# Altium PCB Mirror_PCB1.PcbDoc (part 1 of 2)
Units mm, origin at the board's own origin, x right, y up, seen from the top; angles counter-clockwise.
Board outline 98.5 x 98 mm, 2 copper layers (Top Layer, Bottom Layer), stack 0.187 mm thick; 46 components, 20 nets, 175 pads, 239 vias.
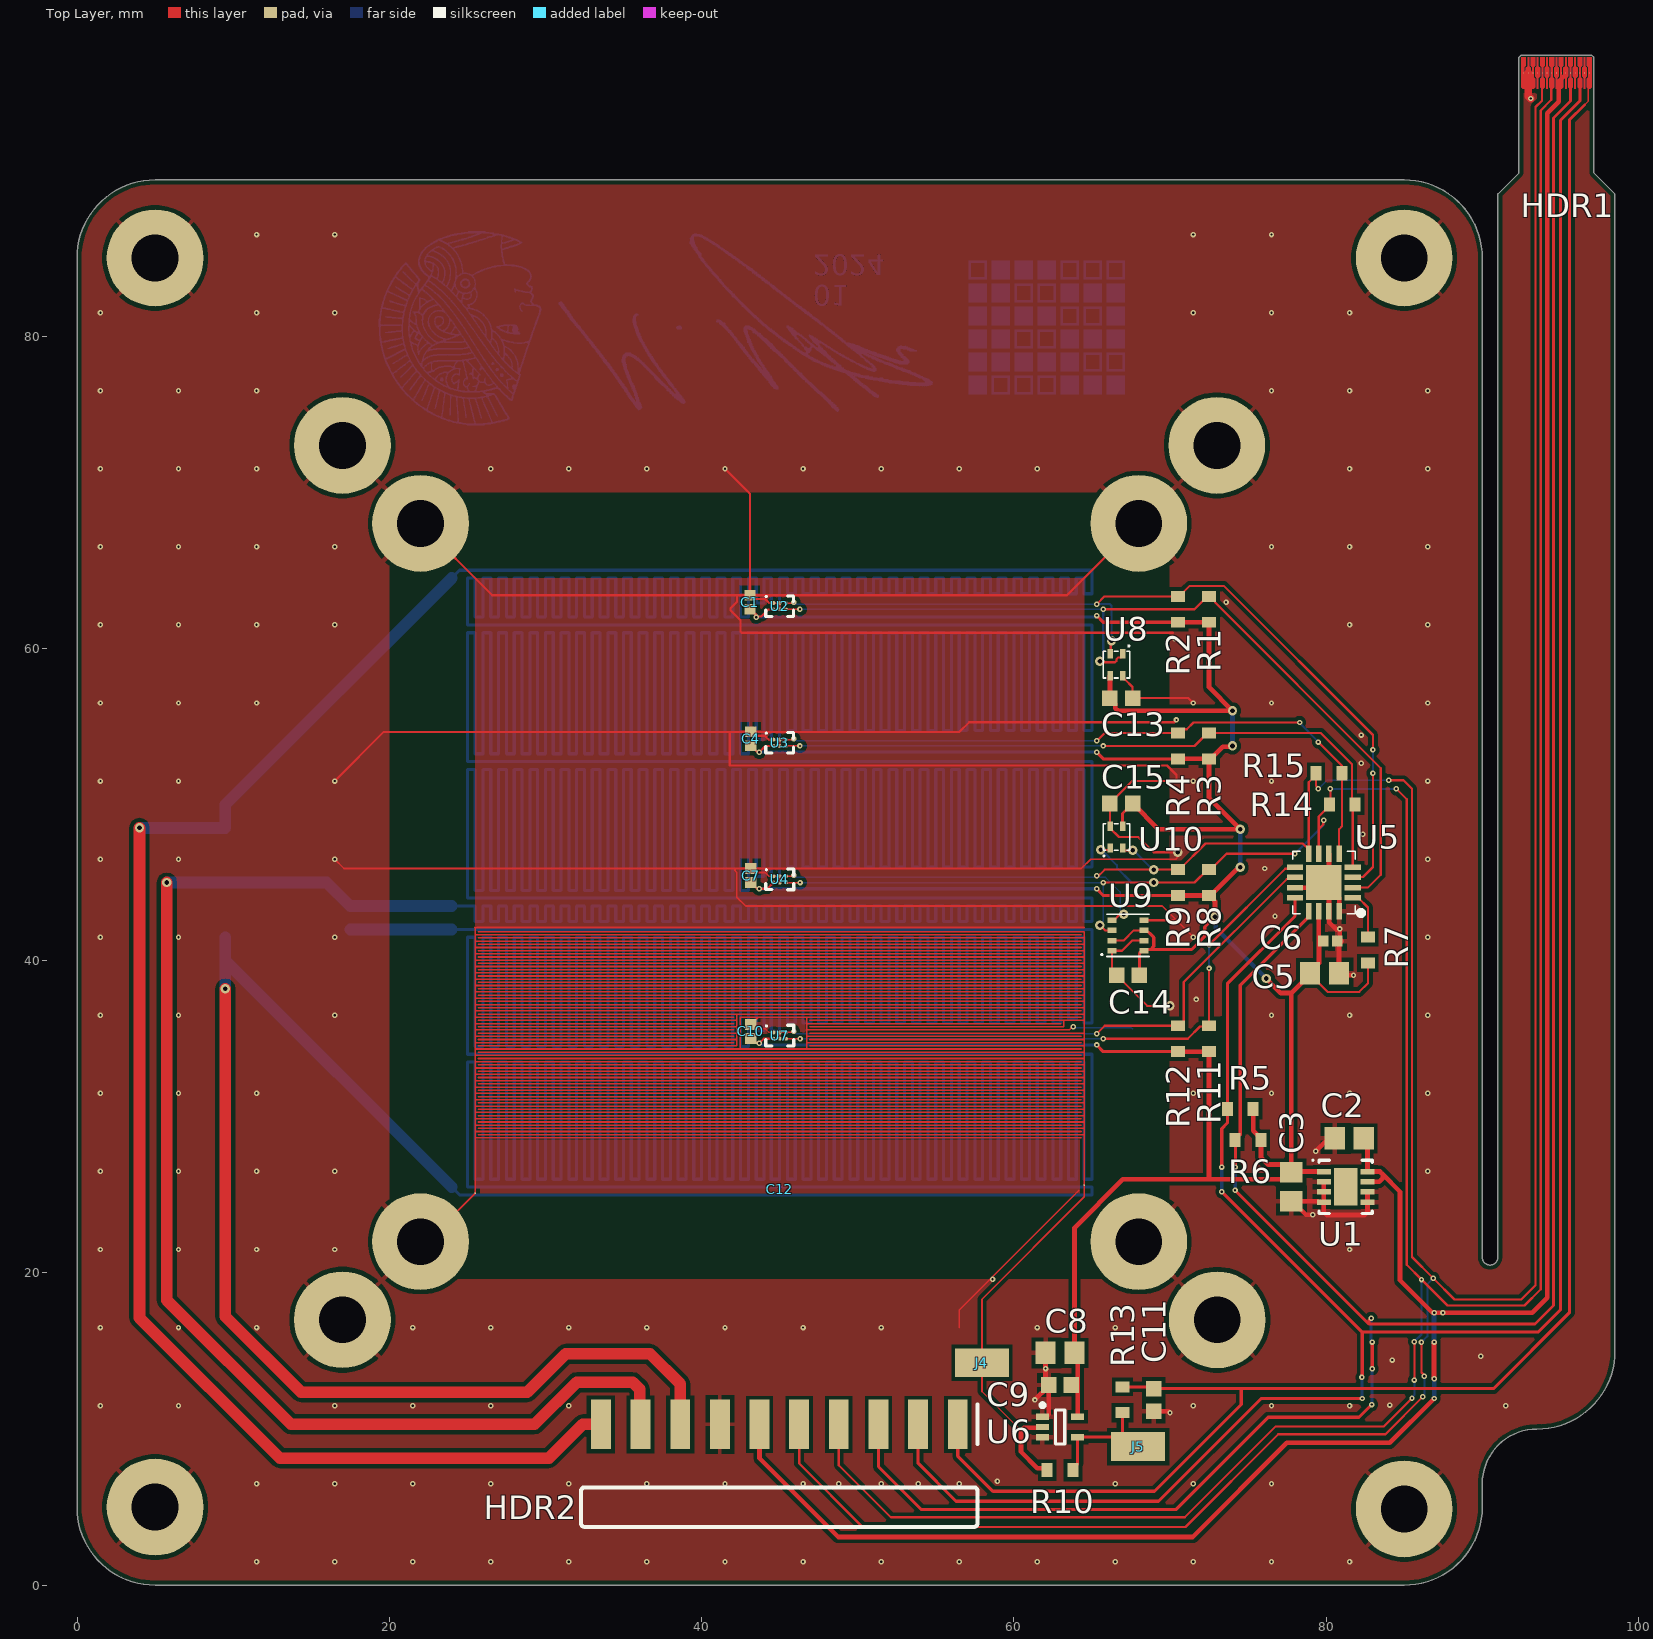
[diagram p0: Top Layer view]
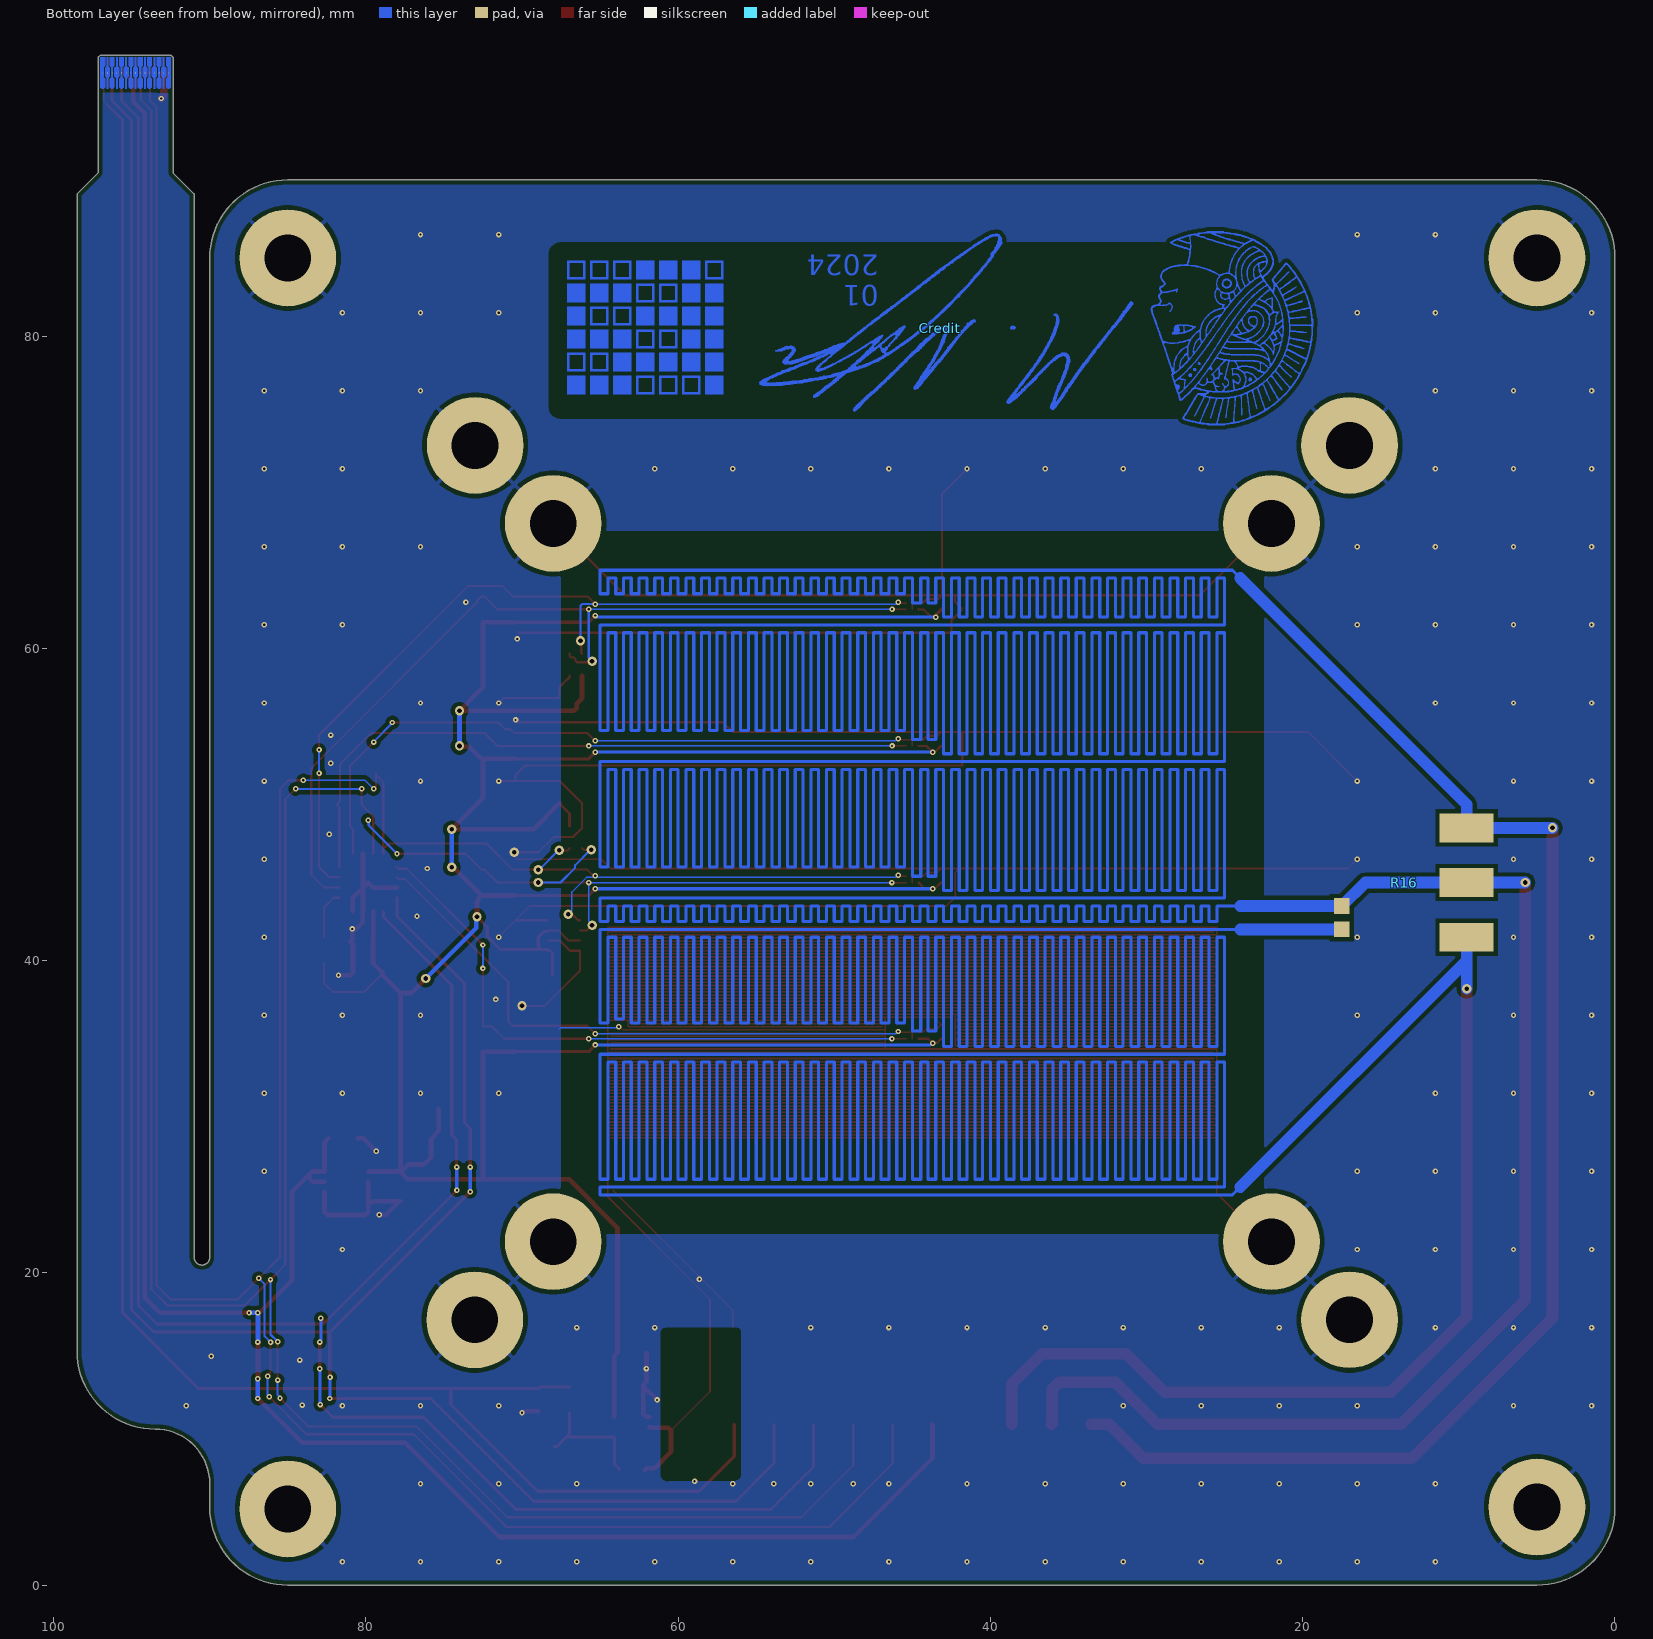
[diagram p1: Bottom Layer view, seen from below]

## Layer stack, top to bottom
Stiffener 1: core 0.1016, Core-009, Dk 4.5
Board Layer Stack Top Coverlay: solder mask 0.012, FC-001, Dk 4
Top Layer: signal copper 0.0175
Dielectric 1: core 0.0508, Core-001, Dk 4.1
Bottom Layer: signal copper 0.0175
Board Layer Stack Bottom Coverlay: solder mask 0.012, FC-001, Dk 4

## Board outline
0,5 ccw(c5,5) 5,0 85,0 ccw(c85,5) 90,5 90,6.5 cw(c93.5,6.5) 93.5,10 ccw(c93.5,15) 98.5,15 98.5,89.1 97.15,90.45 97.15,97.85 97,98 92.5,98 92.35,97.85 92.35,90.45 91,89.1 91,21 cw(c90.5,21) 90.5,20.5 cw(c90.5,21) 90,21 90,85 ccw(c85,85) 85,90 5,90 ccw(c5,85) 0,85

## Design rules (kind name [scope] priority, off if disabled: settings)
BoardOutlineClearance [All] p1: gap=0.3 ignorepadtopadclearanceinfootprint=FALSE
Clearance [All] p1: gap=0.15 ignorepadtopadclearanceinfootprint=TRUE except(0.102: Arc-Arc Arc-Track Arc-Via Arc-Text Track-Track Track-Via Track-Text SMDPad-Via SMDPad-Text THPad-Via THPad-Text Via-Via Via-Text Fill-Text Poly-Text Region-Text Text-Text; 0.2: Arc-Hole Track-Hole SMDPad-Hole THPad-Hole Via-Hole Fill-Hole Poly-Hole Region-Hole Text-Hole)
Creepage [All] p1: checkdistance=0.254 applytopolygonpour=TRUE
DiffPairsRouting DifferentialPairsRouting_1 [InDifferentialPairClass('All Differential Pairs')] p1: maxlimit=0.3 minlimit=0.15 mostfreqgap=0.15 toplayer_minwidth=0.102 toplayer_maxwidth=0.3 toplayer_prefwidth=0.15 bottomlayer_minwidth=0.102 bottomlayer_maxwidth=0.3 bottomlayer_prefwidth=0.15 maxuncoupledlength=12.7
DiffPairsRouting [All] p2: maxlimit=0.3 minlimit=0.102 mostfreqgap=0.15 toplayer_minwidth=0.102 toplayer_maxwidth=0.3 toplayer_prefwidth=0.15 bottomlayer_minwidth=0.102 bottomlayer_maxwidth=0.3 bottomlayer_prefwidth=0.15 maxuncoupledlength=12.7
HoleSize [All] p1: absolutevalues=TRUE maxlimit=5 minlimit=0.15 maxpercent=80.000 minpercent=20.000
HoleToHoleClearance [All] p1: gap=0.3 allowstackedmicrovias=TRUE
MinimumAnnularRing [All] p1: minimumring=0.1
MinimumSolderMaskSliver [All] p1: minsoldermaskwidth=0.5
NetAntennae NetAntennae_GND [InNet('GND')] p1: netantennaetolerance=500
NetAntennae NetAntennae_GND_1 [InNet('NetC12_2')] p2: netantennaetolerance=500
NetAntennae [All] p3: netantennaetolerance=0
PasteMaskExpansion [All] p1: expansion=0.2 percent=-10.000000
PlaneClearance [All] p1: clearance=0.381
PlaneConnect [All] p1: pad.planeconnectstyle=Relief pad.reliefexpansion=0.508 pad.reliefentries=4 pad.reliefconductorwidth=0.254 pad.reliefairgap=0.254 via.planeconnectstyle=Direct via.reliefexpansion=0.508 via.reliefentries=4 via.reliefconductorwidth=0.254 via.reliefairgap=0.254
PolygonConnect [All] p1: thpad.connectstyle=Relief thpad.reliefconductorwidth=0.254 thpad.reliefentries=4 thpad.polygonreliefangle="90 Angle" thpad.airgapwidth=0.28 thpad.conductorbypadedge=TRUE thpad.mindistance=0.381 thpad.enablemindistance=FALSE smdpad.connectstyle=Relief smdpad.reliefconductorwidth=0.254 smdpad.reliefentries=4 smdpad.polygonreliefangle="90 Angle" smdpad.airgapwidth=0.28 smdpad.conductorbypadedge=TRUE smdpad.mindistance=0.381 smdpad.enablemindistance=FALSE via.connectstyle=Direct via.reliefconductorwidth=0.254 via.reliefentries=4 via.polygonreliefangle="90 Angle" via.airgapwidth=0.254
RoutingVias RoutingViaStyle_1 [All] p1: holewidth=0.254 width=0.254 viastyle="Through Hole" minholewidth=0.15 minwidth=0.35 maxholewidth=5 maxwidth=8
RoutingVias [All] p2: holewidth=0.2 width=0.4 viastyle="Through Hole" minholewidth=0.2 minwidth=0.4 maxholewidth=0.2 maxwidth=0.4
SMDNeckDown [All] p1: percent=100.000
SilkToSilkClearance [All] p1: silktosilkclearance=0
SilkToSolderMaskClearance SilkscreenOverComponentPads [IsPad] p1: minsilkscreentomaskgap=0 clearancetoexposedcopper=TRUE
SolderMaskExpansion [All] p1: expansion=0.1 istentingtop=FALSE
Width [All] p1: maxlimit=0.8 minlimit=0.102 preferedwidth=0.15 minimp=50.000000 maximp=50.000000 favimp=50.000000
20 further rules are at their usual default settings.

## Components (designator, comment, footprint, x,y, rotation, side; value= is the part's Value field where it differs from the comment)
C1 "10nF" CAP_SM0402_YAGEOCC2_N 43.1,62.95 r90 top
C2 "1uF" CAP_SM0805_YAGEOCC2_N 81.474,28.619 r180 top
C3 "1uF" CAP_SM0805_YAGEOCC2_N 77.771,25.514 r270 top
C4 "10nF" CAP_SM0402_YAGEOCC2_N 43.146,54.2 r90 top
C5 "1uF" CAP_SM0805_YAGEOCC2_N 79.896,39.196 r0 top
C6 "10nF" CAP_SM0402_YAGEOCC2_N 80.272,41.25 r0 top
C7 "10nF" CAP_SM0402_YAGEOCC2_N 43.146,45.45 r90 top
C8 "1uF" CAP_SM0805_YAGEOCC2_N 62.959,14.876 r180 top
C9 "10nF" CAP_SM0603_YAGEOCC2_N 62.959,12.822 r180 top
C10 "10nF" CAP_SM0402_YAGEOCC2_N 43.146,35.461 r90 top
C11 "10nF" CAP_SM0603_YAGEOCC2_N 68.959,11.862 r270 top
C12 "Capacitor_InterdigitatedFingers" CapacitorWire 25.5,25 r0 top
C13 "100nF" CAP_SM0603_YAGEOCC2_N 66.876,56.81 r0 top
C14 "100nF" CAP_SM0603_YAGEOCC2_N 67.308,39.058 r180 top
C15 "100nF" CAP_SM0603_YAGEOCC2_N 66.876,50.066 r180 top
Credit "Credits" CREDITS_CU_SIGNED 43.2,80.5 r0 bottom
HDR1 "Dual Row 15Pos FPC Contacts" AYF331535_FPC 96.85,95.85 r180 top
HDR2 "TSM-120-01-T-SH" TSM-120-01-T-SH 56.41,10.3 r180 top
J4 "S1751-46 TestPoint" "S1751-46 TestPoint" 57.959,14.246 r0 top
J5 "S1751-46 TestPoint" "S1751-46 TestPoint" 67.959,8.876 r0 top
R1 "3K3" RES_SM0603_YAGEORC_N 72.5,62.5 r270 top
R2 "3K3" RES_SM0603_YAGEORC_N 70.5,62.5 r270 top
R3 "3K3" RES_SM0603_YAGEORC_N 72.5,53.75 r270 top
R4 "3K3" RES_SM0603_YAGEORC_N 70.5,53.75 r270 top
R5 "3K3" RES_SM0603_YAGEORC_N 74.5,30.5 r180 top
R6 "3K3" RES_SM0603_YAGEORC_N 75,28.5 r180 top
R7 "10K" RES_SM0603_YAGEORC_N 82.678,40.674 r90 top
R8 "3K3" RES_SM0603_YAGEORC_N 72.5,45 r270 top
R9 "3K3" RES_SM0603_YAGEORC_N 70.5,45 r270 top
R10 "10K" RES_SM0603_YAGEORC_N 62.959,7.376 r180 top
R11 "3K3" RES_SM0603_YAGEORC_N 72.5,35 r270 top
R12 "3K3" RES_SM0603_YAGEORC_N 70.5,35 r270 top
R13 "10K" RES_SM0603_YAGEORC_N 66.959,11.876 r270 top
R14 "0" RES_SM0603_YAGEORC_N 81.033,50 r0 top
R15 "0" RES_SM0603_YAGEORC_N 80.181,52 r0 top
R16 "HeaterWire_1" HeaterWire_1 9.5,48.5 r0 top
U1 "TPS78433" TPS784xxxQDRBRQ1_SON 81.251,25.514 r0 top
U2 "AS6221" AS6221_BGA_LargePads 45,62.7 r0 top
U3 "AS6221" AS6221_BGA_LargePads 45,53.95 r0 top
U4 "AS6221" AS6221_BGA_LargePads 45.007,45.2 r0 top
U5 "PCA9546ARGVR" QFN65P400X400X100-17N-D 79.856,45 r180 top
U6 "SN74LVC1G14" SOT65P210X110-5N_SC70 62.959,10.131 r0 top
U7 "AS6221" AS6221_BGA_LargePads 45.007,35.2 r0 top
U8 "SHT45-AD1F" "SHT45 DFN" 66.563,58.951 r270 top
U9 "BME280_I2C" BME280 67.308,41.612 r180 top
U10 "SHT45-AD1F" "SHT45 DFN" 66.563,47.912 r90 top

## Footprints (in the part's own frame and the unit in brackets; to place one, negate y for a bottom-side part, rotate by r counter-clockwise, add the part's x,y. Pads: shape width x height; smd on the part's side, far side on the other; paste and mask are expansions set on the pad)
AS6221_BGA_LargePads [mm] "BGA, 6-Leads, Body 1.50x1.02mmx0.55mm, Pitch 0.40mm"
  round 0.25 smd paste-0.013: A1(-0.4,0.2) A2(0,0.2) A3(0.4,0.2) B1(-0.4,-0.2) B2(0,-0.2) B3(0.4,-0.2)
  silkscreen extent -0.9,-0.66 0.89,0.67, body extent -0.75,-0.52 0.75,0.52, height 0.55
AYF331535_FPC [mil]
  round 1 all layers, no hole paste-99999 mask+3.94: 1(0,-39.37) 2(11.81,-39.37)
  round 1 all layers, no hole paste-99999: 3(23.62,-39.37) 4(35.43,-39.37) 5(47.24,-39.37) 6(59.06,-39.37) 7(70.87,-39.37) 8(82.68,-39.37) 9(94.49,-39.37) 10(106.3,-39.37) 11(118.11,-39.37) 12(129.92,-39.37) 13(141.73,-39.37) 14(153.54,-39.37) 15(165.35,-39.37)
  Top Layer region: -5.91,-78.74 -5.91,-3.94 -1.97,0 -1.97,0 1.97,0 5.91,-3.94 5.91,-24.61 1.97,-28.54 1.97,-54.13 5.91,-58.07 5.91,-78.74
  Top Layer region: 5.91,-52.17 5.91,-30.51 9.84,-26.57 9.84,0 13.78,0 13.78,-26.57 17.72,-30.51 17.72,-52.17 13.78,-56.1 13.78,-78.74 9.84,-78.74 9.84,-56.1
  Top Layer region: 17.72,-78.74 17.72,-58.07 21.65,-54.13 21.65,-28.54 17.72,-24.61 17.72,-3.94 21.65,0 25.59,0 29.53,-3.94 29.53,-24.61 25.59,-28.54 25.59,-54.13 29.53,-58.07 29.53,-78.74
  Top Layer region: 29.53,-52.17 29.53,-30.51 33.46,-26.57 33.46,0 37.4,0 37.4,-26.57 41.34,-30.51 41.34,-52.17 37.4,-56.1 37.4,-78.74 33.46,-78.74 33.46,-56.1
  Top Layer region: 41.34,-78.74 41.34,-58.07 45.28,-54.13 45.28,-28.54 41.34,-24.61 41.34,-3.94 45.28,0 49.21,0 53.15,-3.94 53.15,-24.61 49.21,-28.54 49.21,-54.13 53.15,-58.07 53.15,-78.74
  Top Layer region: 64.96,-78.74 64.96,-58.07 68.9,-54.13 68.9,-28.54 64.96,-24.61 64.96,-3.94 68.9,0 72.83,0 76.77,-3.94 76.77,-24.61 72.83,-28.54 72.83,-54.13 76.77,-58.07 76.77,-78.74
  Top Layer region: 53.15,-52.17 53.15,-30.51 57.09,-26.57 57.09,0 61.02,0 61.02,-26.57 64.96,-30.51 64.96,-52.17 61.02,-56.1 61.02,-78.74 57.09,-78.74 57.09,-56.1
  Top Layer region: 76.77,-52.17 76.77,-30.51 80.71,-26.57 80.71,0 84.65,0 84.65,-26.57 88.58,-30.51 88.58,-52.17 84.65,-56.1 84.65,-78.74 80.71,-78.74 80.71,-56.1
  Top Layer region: 88.58,-78.74 88.58,-58.07 92.52,-54.13 92.52,-28.54 88.58,-24.61 88.58,-3.94 92.52,0 96.46,0 100.39,-3.94 100.39,-24.61 96.46,-28.54 96.46,-54.13 100.39,-58.07 100.39,-78.74
  Top Layer region: 100.39,-52.17 100.39,-30.51 104.33,-26.57 104.33,0 108.27,0 108.27,-26.57 112.2,-30.51 112.2,-52.17 108.27,-56.1 108.27,-78.74 104.33,-78.74 104.33,-56.1
  Top Layer region: 112.2,-78.74 112.2,-58.07 116.14,-54.13 116.14,-28.54 112.2,-24.61 112.2,-3.94 116.14,0 120.08,0 124.02,-3.94 124.02,-24.61 120.08,-28.54 120.08,-54.13 124.02,-58.07 124.02,-78.74
  Top Layer region: 124.02,-52.17 124.02,-30.51 127.95,-26.57 127.95,0 131.89,0 131.89,-26.57 135.83,-30.51 135.83,-52.17 131.89,-56.1 131.89,-78.74 127.95,-78.74 127.95,-56.1
  Top Layer region: 135.83,-78.74 135.83,-58.07 139.76,-54.13 139.76,-28.54 135.83,-24.61 135.83,-3.94 139.76,0 143.7,0 147.64,-3.94 147.64,-24.61 143.7,-28.54 143.7,-54.13 147.64,-58.07 147.64,-78.74
  Top Layer region: 147.64,-52.17 147.64,-30.51 151.57,-26.57 151.57,0 155.51,0 155.51,-26.57 159.45,-30.51 159.45,-52.17 155.51,-56.1 155.51,-78.74 151.57,-78.74 151.57,-56.1
  Top Layer region: 159.45,-78.74 159.45,-58.07 163.39,-54.13 163.39,-54.13 163.39,-28.54 159.45,-24.61 159.45,-24.61 159.45,-3.94 163.39,0 167.32,0 171.26,-3.94 171.26,-78.74
  Bottom Layer region: -5.91,-78.74 -5.91,-3.94 -1.97,0 -1.97,0 1.97,0 5.91,-3.94 5.91,-24.61 1.97,-28.54 1.97,-54.13 5.91,-58.07 5.91,-78.74
  Bottom Layer region: 5.91,-52.17 5.91,-30.51 9.84,-26.57 9.84,0 13.78,0 13.78,-26.57 17.72,-30.51 17.72,-52.17 13.78,-56.1 13.78,-78.74 9.84,-78.74 9.84,-56.1
  Bottom Layer region: 17.72,-78.74 17.72,-58.07 21.65,-54.13 21.65,-28.54 17.72,-24.61 17.72,-3.94 21.65,0 25.59,0 29.53,-3.94 29.53,-24.61 25.59,-28.54 25.59,-54.13 29.53,-58.07 29.53,-78.74
  Bottom Layer region: 29.53,-52.17 29.53,-30.51 33.46,-26.57 33.46,0 37.4,0 37.4,-26.57 41.34,-30.51 41.34,-52.17 37.4,-56.1 37.4,-78.74 33.46,-78.74 33.46,-56.1
  Bottom Layer region: 41.34,-78.74 41.34,-58.07 45.28,-54.13 45.28,-28.54 41.34,-24.61 41.34,-3.94 45.28,0 49.21,0 53.15,-3.94 53.15,-24.61 49.21,-28.54 49.21,-54.13 53.15,-58.07 53.15,-78.74
  Bottom Layer region: 64.96,-78.74 64.96,-58.07 68.9,-54.13 68.9,-28.54 64.96,-24.61 64.96,-3.94 68.9,0 72.83,0 76.77,-3.94 76.77,-24.61 72.83,-28.54 72.83,-54.13 76.77,-58.07 76.77,-78.74
  Bottom Layer region: 53.15,-52.17 53.15,-30.51 57.09,-26.57 57.09,0 61.02,0 61.02,-26.57 64.96,-30.51 64.96,-52.17 61.02,-56.1 61.02,-78.74 57.09,-78.74 57.09,-56.1
  Bottom Layer region: 76.77,-52.17 76.77,-30.51 80.71,-26.57 80.71,0 84.65,0 84.65,-26.57 88.58,-30.51 88.58,-52.17 84.65,-56.1 84.65,-78.74 80.71,-78.74 80.71,-56.1
  Bottom Layer region: 88.58,-78.74 88.58,-58.07 92.52,-54.13 92.52,-28.54 88.58,-24.61 88.58,-3.94 92.52,0 96.46,0 100.39,-3.94 100.39,-24.61 96.46,-28.54 96.46,-54.13 100.39,-58.07 100.39,-78.74
  Bottom Layer region: 100.39,-52.17 100.39,-30.51 104.33,-26.57 104.33,0 108.27,0 108.27,-26.57 112.2,-30.51 112.2,-52.17 108.27,-56.1 108.27,-78.74 104.33,-78.74 104.33,-56.1
  Bottom Layer region: 112.2,-78.74 112.2,-58.07 116.14,-54.13 116.14,-28.54 112.2,-24.61 112.2,-3.94 116.14,0 120.08,0 124.02,-3.94 124.02,-24.61 120.08,-28.54 120.08,-54.13 124.02,-58.07 124.02,-78.74
  Bottom Layer region: 124.02,-52.17 124.02,-30.51 127.95,-26.57 127.95,0 131.89,0 131.89,-26.57 135.83,-30.51 135.83,-52.17 131.89,-56.1 131.89,-78.74 127.95,-78.74 127.95,-56.1
  Bottom Layer region: 135.83,-78.74 135.83,-58.07 139.76,-54.13 139.76,-28.54 135.83,-24.61 135.83,-3.94 139.76,0 143.7,0 147.64,-3.94 147.64,-24.61 143.7,-28.54 143.7,-54.13 147.64,-58.07 147.64,-78.74
  Bottom Layer region: 147.64,-52.17 147.64,-30.51 151.57,-26.57 151.57,0 155.51,0 155.51,-26.57 159.45,-30.51 159.45,-52.17 155.51,-56.1 155.51,-78.74 151.57,-78.74 151.57,-56.1
  Bottom Layer region: 159.45,-78.74 159.45,-58.07 163.39,-54.13 163.39,-54.13 163.39,-28.54 159.45,-24.61 159.45,-24.61 159.45,-3.94 163.39,0 167.32,0 171.26,-3.94 171.26,-78.74
BME280 [mm]
  rect 0.6x0.35 smd: 1(1.025,0.975) 2(1.025,0.325) 3(1.025,-0.325) 4(1.025,-0.975) 5(-1.025,-0.975) 6(-1.025,-0.325) 7(-1.025,0.325) 8(-1.025,0.975)
  silkscreen extent -1.35,-1.35 1.72,1.35, body extent -1.25,-1.25 1.25,1.25, height 1
CAP_SM0402_YAGEOCC2_N [mm] "Capacitor, Yageo CC Class2, SM0402, IPC Medium Density"
  rect 0.68x0.72 smd: 1(-0.45,0) 2(0.45,0)
  body extent -0.55,-0.35 0.55,0.35, height 0.6
CAP_SM0603_YAGEOCC2_N [mm] "Capacitor, Yageo CC Class2, SM0603, IPC Medium Density"
  rect 1x1 smd: 1(-0.727,0) 2(0.727,0)
  body extent -0.9,-0.5 0.9,0.5, height 0.9
CAP_SM0805_YAGEOCC2_N [mm] "Capacitor, Yageo CC Class2, SM0805, IPC Medium Density"
  rect 1.3x1.45 smd: 1(-0.927,0) 2(0.927,0)
  body extent -1.1,-0.72 1.1,0.72, height 1.45
CapacitorWire [mil]
  rect 4x4 smd paste-99999 mask+0: 1(0.06,3.75) 2(1536.06,24.45)
  Top Layer lines w4: 0.06,3.75 0.06,674.21 ; 0.06,143.75 1528.06,143.75 ; 0.06,159.75 1528.06,159.75 ; 0.06,175.75 1528.06,175.75 ; 0.06,191.75 1528.06,191.75 ; 0.06,207.75 1528.06,207.75 ; 0.06,223.75 1528.06,223.75 ; 0.06,239.75 1528.06,239.75 ; 0.06,255.75 1528.06,255.75 ; 0.06,271.75 1528.06,271.75 ; 0.06,287.75 1528.06,287.75 ; 0.06,303.75 1528.06,303.75 ; 0.06,319.75 1528.06,319.75 ; 0.06,335.75 1528.06,335.75 ; 0.06,351.75 1528.06,351.75 ; 0.06,367.75 668.06,367.75 ; 0.06,383.75 652,383.75 ; 0.06,399.75 652,399.75 ; 0.06,415.75 652,415.75 ; 0.06,431.75 652,431.75 ; 0.06,447.75 652,447.75 ; 0.06,463.75 1528.06,463.75 ; 0.06,479.75 1528.06,479.75 ; 0.06,495.75 1528.06,495.75 ; 0.06,511.75 1528.06,511.75 ; 0.06,527.75 1528.06,527.75 ; 0.06,543.75 1528.06,543.75 ; 0.06,559.75 1528.06,559.75 ; 0.06,575.75 1528.06,575.75 ; 0.06,591.75 1528.06,591.75 ; 0.06,607.75 1528.06,607.75 ; 0.06,623.75 1528.06,623.75 ; 0.06,639.75 1528.06,639.75 ; 0.06,655.75 1528.06,655.75 ; 8.07,151.75 1536.02,151.75 ; 8.07,167.75 1536.02,167.75 ; 8.07,183.75 1536.02,183.75 ; 8.07,199.75 1536.02,199.75 ; 8.07,215.75 1536.02,215.75 ; 8.07,231.75 1536.02,231.75 ; 8.07,247.75 1536.02,247.75 ; 8.07,263.75 1536.02,263.75 ; 8.07,279.75 1536.02,279.75 ; 8.07,295.75 1536.02,295.75 ; 8.07,311.75 1536.02,311.75 ; 8.07,327.75 1536.02,327.75 ; 8.07,343.75 1536.02,343.75 ; 8.06,359.75 668.06,359.75 1536.06,359.75 ; 8.06,375.75 660.01,375.75 660.01,455.75 ; 8.06,407.75 659.98,407.75 ; 8.06,423.75 659.94,423.75 ; 8.06,439.75 659.91,439.75 ; 8.07,455.75 1536.02,455.75 ; 8.07,471.75 1536.02,471.75 ; 8.07,487.75 1536.02,487.75 ; 8.07,503.75 1536.02,503.75 ; 8.07,519.75 1536.02,519.75 ; 8.07,535.75 1536.02,535.75 ; 8.07,551.75 1536.02,551.75 ; 8.07,567.75 1536.02,567.75 ; 8.07,583.75 1536.02,583.75 ; 8.07,599.75 1536.02,599.75 ; 8.07,615.75 1536.02,615.75 ; 8.07,631.75 1536.02,631.75 ; 8.07,647.75 1536.02,647.75 ; 8.06,663.75 1536.02,663.75 ; 8.16,391.75 660.01,391.75 ; 844.06,375.75 1536.06,375.75 ; 844.06,391.75 1536.06,391.75 ; 844.06,407.75 1536.06,407.75 ; 844.06,423.75 1484.06,423.75 1484.06,439.72 ; 844.06,439.75 1536.06,439.75 ; 1476.06,431.75 836.06,431.75 ; 1508.06,423.75 1505.83,423.75 1497.83,415.75 836.06,415.75 ; 1528.06,367.75 836.06,367.75 ; 1528.06,383.75 836.06,383.75 ; 1528.06,399.75 836.06,399.75 ; 1528.06,447.75 836.06,447.75 ; 1536.06,24.45 1536.06,439.75 ; 1536.06,471.75 1536.06,487.75 ; 1536.06,661.4 1536.06,487.75 ; 668.06,367.75 836.06,367.75 ; 668.06,367.75 668.06,447.75 836.06,447.75 ; 836.06,367.75 836.06,383.75 ; 836.06,383.75 836.06,399.75 ; 836.06,399.75 836.06,415.75 ; 836.06,415.75 836.06,431.75 ; 836.06,431.75 836.06,447.75 ; 1536.06,439.75 1536.06,487.75
  Top Layer lines w5.51: 0.06,674.21 1535.43,674.21
CREDITS_CU_SIGNED [mm]
  Top Layer region: -19.892,3.183 -19.927,3.219 -19.942,3.277 -19.927,3.363 -19.848,3.399 -19.776,3.385 -19.741,3.349 -19.755,3.219 -19.791,3.183 -19.877,3.183
  Top Layer region: 407 vertices and 73 holes, not listed, extent -23.868,-6.207 -13.456,6.218
  Top Layer region: -18.223,-2.569 -18.094,-2.67 -18.072,-2.691 -18.029,-2.792 -18.044,-2.979 -18.101,-3.079 -18.123,-3.101 -18.151,-3.115 -18.18,-3.144 -18.252,-3.173 -18.374,-3.18 -18.446,-3.166 -18.525,-3.115 -18.619,-3.022 -18.64,-2.943 -18.648,-2.792 -18.576,-2.662 -18.525,-2.612 -18.504,-2.605 -18.497,-2.598 -18.396,-2.554 hole: -18.295,-2.67 -18.41,-2.684 -18.425,-2.684 -18.504,-2.749 -18.533,-2.821 -18.547,-2.878 -18.511,-2.972 -18.489,-2.993 -18.475,-3.022 -18.396,-3.058 -18.338,-3.072 -18.259,-3.051 -18.209,-3.015 -18.159,-2.964 -18.144,-2.907 -18.13,-2.864 -18.159,-2.777 -18.223,-2.698
  Top Layer region: -16.354,2.709 -16.311,2.752 -16.239,2.738 -16.217,2.716 -16.203,2.687 -16.188,2.644 -16.203,2.601 -16.224,2.565 -16.282,2.551 -16.339,2.565 -16.39,2.615 -16.375,2.687 -16.361,2.702
  Top Layer region: -16.081,2.925 -16.102,2.989 -16.088,3.061 -16.052,3.097 -15.994,3.112 -15.937,3.097 -15.901,3.061 -15.879,2.982 -15.901,2.932 -15.922,2.91 -15.994,2.881 -16.066,2.91 -16.073,2.917
  Top Layer region: -14.858,0.379 -14.822,0.343 -14.837,0.286 -14.887,0.235 -14.959,0.192 -14.966,0.142 -14.952,0.099 -14.966,-0.074 -15.024,-0.174 -15.045,-0.196 -15.117,-0.225 -15.175,-0.239 -15.362,-0.254 -15.836,-0.239 -15.879,-0.225 -16.002,-0.203 -16.073,-0.189 -16.145,-0.16 -16.224,-0.138 -16.332,-0.131 -16.339,-0.095 -16.304,-0.045 -16.253,0.005 -16.224,0.02 -16.167,0.077 -16.138,0.092 -16.109,0.12 -15.807,0.264 -15.75,0.279 -15.642,0.314 -15.635,0.322 -15.462,0.35 -15.405,0.365 -15.218,0.379 -15.16,0.394 hole: -15.448,0.25 -15.491,0.235 -15.52,0.221 -15.541,0.199 -15.556,0.142 -15.541,-0.059 -15.505,-0.138 -15.455,-0.146 -15.326,-0.131 -15.297,-0.103 -15.333,-0.009 -15.34,0.012 -15.34,0.027 -15.347,0.106 -15.34,0.243 hole: -15.735,0.178 -15.743,0.171 -15.75,0.163 -15.843,0.128 -16.095,-0.009 -16.102,-0.045 -16.081,-0.067 -16.023,-0.081 -15.944,-0.103 -15.872,-0.117 -15.757,-0.131 -15.678,-0.138 -15.642,-0.117 -15.656,0.07 -15.671,0.128 -15.685,0.171
  Top Layer region: 16.854,2.126 16.854,2.746 18.017,2.746 18.017,1.583 16.854,1.583 16.854,2.048
  Top Layer region: 20.963,3.366 20.963,3.056 19.8,3.056 19.8,4.219 20.963,4.219 20.963,3.443
  Top Layer region: 20.963,2.436 20.963,1.583 19.8,1.583 19.8,2.746 20.963,2.746 20.963,2.513
  Top Layer region: 22.436,1.893 22.436,1.816 22.436,1.583 21.273,1.583 21.273,2.746 22.436,2.746 hole: 22.281,2.591 21.428,2.591 21.428,1.738 22.281,1.738
  Top Layer region: 22.436,3.211 22.436,3.056 21.273,3.056 21.273,4.219 22.436,4.219 22.436,3.288
  Top Layer region: 23.909,1.583 22.746,1.583 22.746,2.746 23.909,2.746 hole: 23.753,2.591 22.901,2.591 22.901,1.738 23.753,1.738 23.753,2.513
  Top Layer region: -16.656,2.292 -16.62,2.342 -16.526,2.349 -16.49,2.313 -16.505,2.213 -16.541,2.177 -16.613,2.191 -16.649,2.227 -16.663,2.285
  Top Layer region: 15.381,0.808 15.381,1.273 16.544,1.273 16.544,0.11 15.381,0.11 15.381,0.73
  Top Layer region: 19.955,0.11 19.8,0.11 19.8,1.273 20.963,1.273 20.963,0.11 20.033,0.11
  Top Layer region: 21.816,1.273 22.436,1.273 22.436,0.11 21.273,0.11 21.273,1.273 21.738,1.273
  Top Layer region: 15.071,-1.208 15.071,-1.363 13.909,-1.363 13.909,-0.2 15.071,-0.2 15.071,-1.13
  Top Layer region: 22.746,1.118 22.746,1.273 23.909,1.273 23.909,0.11 22.746,0.11 22.746,1.04
  Top Layer region: 16.544,3.056 15.381,3.056 15.381,4.219 16.544,4.219 hole: 16.389,4.064 15.536,4.064 15.536,3.676 15.536,3.598 15.536,3.211 16.389,3.211
  Top Layer region: 16.002,-0.2 16.544,-0.2 16.544,-1.363 15.381,-1.363 15.381,-0.2 15.924,-0.2
  Top Layer region: 16.544,2.513 16.544,1.583 15.381,1.583 15.381,2.746 16.544,2.746 16.544,2.591
  Top Layer region: 20.963,-1.363 19.8,-1.363 19.8,-0.51 19.8,-0.433 19.8,-0.2 20.963,-0.2 hole: 20.808,-0.355 19.955,-0.355 19.955,-0.665 19.955,-0.743 19.955,-1.208 20.808,-1.208
  Top Layer region: 18.017,0.11 16.854,0.11 16.854,1.273 18.017,1.273 hole: 17.862,1.118 17.009,1.118 17.009,0.265 17.862,0.265
  Top Layer region: 18.017,3.056 16.854,3.056 16.854,4.219 18.017,4.219 hole: 17.862,4.064 17.009,4.064 17.009,3.211 17.862,3.211
  Top Layer region: 16.854,-0.433 16.854,-0.2 18.017,-0.2 18.017,-1.363 16.854,-1.363 16.854,-0.51
  Top Layer region: 22.436,-1.363 21.273,-1.363 21.273,-0.2 22.436,-0.2 hole: 22.281,-0.355 21.428,-0.355 21.428,-0.665 21.428,-0.743 21.428,-1.208 22.281,-1.208
  Top Layer region: 19.335,-1.363 18.327,-1.363 18.327,-0.2 19.49,-0.2 19.49,-1.363 19.412,-1.363
  Top Layer region: 19.49,3.056 18.327,3.056 18.327,4.219 19.49,4.219 hole: 19.335,4.064 18.482,4.064 18.482,3.211 19.335,3.211
  Top Layer region: 18.327,2.513 18.327,2.746 19.49,2.746 19.49,1.583 18.327,1.583 18.327,2.436
  Top Layer region: 19.49,0.11 18.327,0.11 18.327,1.273 19.49,1.273 hole: 19.335,1.118 18.482,1.118 18.482,0.73 18.482,0.653 18.482,0.265 19.335,0.265
  Top Layer region: 23.753,-0.2 23.909,-0.2 23.909,-1.363 22.746,-1.363 22.746,-0.2 23.676,-0.2
  Top Layer region: 15.071,-4.309 13.909,-4.309 13.909,-3.146 15.071,-3.146 hole: 14.916,-3.301 14.064,-3.301 14.064,-4.153 14.916,-4.153 14.916,-3.921 14.916,-3.843
  Top Layer region: 14.994,-2.836 13.909,-2.836 13.909,-1.673 15.071,-1.673 15.071,-2.836
  Top Layer region: 16.234,-2.836 15.381,-2.836 15.381,-1.673 16.544,-1.673 16.544,-2.836 16.312,-2.836
  Top Layer region: 15.381,-4.153 15.381,-3.146 16.544,-3.146 16.544,-4.309 15.381,-4.309 15.381,-4.231
  Top Layer region: 18.017,-1.75 18.017,-2.836 16.854,-2.836 16.854,-1.673 18.017,-1.673 hole: 17.862,-1.828 17.009,-1.828 17.009,-2.448 17.009,-2.526 17.009,-2.681 17.862,-2.681
  Top Layer region: 18.017,-3.611 18.017,-4.309 16.854,-4.309 16.854,-3.146 18.017,-3.146 18.017,-3.533
  Top Layer region: 19.102,-3.146 19.49,-3.146 19.49,-4.309 18.327,-4.309 18.327,-3.146 19.025,-3.146
  Top Layer region: 19.49,-2.836 18.327,-2.836 18.327,-2.138 18.327,-2.06 18.327,-1.673 19.49,-1.673 hole: 19.335,-1.828 18.482,-1.828 18.482,-2.138 18.482,-2.216 18.482,-2.681 19.335,-2.681
  Top Layer region: 20.575,-2.836 19.8,-2.836 19.8,-1.673 20.963,-1.673 20.963,-2.836 20.653,-2.836
  Top Layer region: 20.963,-4.309 19.8,-4.309 19.8,-3.146 20.963,-3.146 hole: 20.808,-3.301 19.955,-3.301 19.955,-4.153 20.808,-4.153 20.808,-3.533 20.808,-3.456
  Top Layer region: 22.436,-4.309 21.273,-4.309 21.273,-3.146 22.436,-3.146 hole: 22.281,-3.301 21.428,-3.301 21.428,-4.076 21.428,-4.153 22.281,-4.153
  Top Layer region: 21.273,-2.836 21.273,-1.673 22.436,-1.673 22.436,-2.836 21.35,-2.836
  Top Layer region: 22.746,-2.138 22.746,-1.673 23.909,-1.673 23.909,-2.836 22.746,-2.836 22.746,-2.216
  Top Layer region: 23.909,-4.309 22.746,-4.309 22.746,-3.146 23.909,-3.146 hole: 23.753,-3.301 22.901,-3.301 22.901,-4.153 23.753,-4.153
  Top Layer region: 14.684,4.219 15.071,4.219 15.071,3.056 13.909,3.056 13.909,4.219 14.606,4.219
  Top Layer region: 15.071,0.575 15.071,0.11 13.909,0.11 13.909,1.273 15.071,1.273 15.071,0.653
  Top Layer region: 13.986,1.583 13.909,1.583 13.909,2.746 15.071,2.746 15.071,1.583 14.064,1.583
  Top Layer region: 22.746,3.831 22.746,4.219 23.909,4.219 23.909,3.056 22.746,3.056 22.746,3.753
  Top Layer region: 1948 vertices and 5 holes, not listed, extent -3.946,-6.061 11.593,4.456
  Top Layer region: 1517 vertices and 0 holes, not listed, extent -2.272,-0.586 5.604,5.343
  Top Layer region: -4.825,-0.027 -4.814,-0.016 -4.805,-0.013 -4.8,0.026 -4.763,0.062 -4.488,0.057 -4.474,0.037 -4.457,0.026 -4.46,0.006 -4.48,-0.002 -4.485,-0.025 -4.48,-0.047 -4.485,-0.07 -4.505,-0.084 -4.578,-0.157 -4.662,-0.151 -4.671,-0.143 -4.676,-0.131 -4.772,-0.126 -4.791,-0.1 -4.803,-0.095 -4.817,-0.075 -4.833,-0.064 -4.828,-0.03
  Top Layer region: 1867 vertices and 0 holes, not listed, extent -12.356,-1.724 -4.21,5.236
  Top Layer pour cut-out: 24.3,5.8 24.3,-5.5 -17.606,-5.5 -17.696,5.8
  Top Layer pour cut-out: 24.3,5.8 24.606,5.739 24.866,5.566 25.039,5.306 25.1,5 25.1,5 25.1,-4.7 25.039,-5.006 24.866,-5.266 24.606,-5.439 24.3,-5.5 24.3,-5.5
  Top Layer region: 22.746,1.118 22.746,1.273 23.909,1.273 23.909,0.11 22.746,0.11 22.746,1.04
  Top Layer region: 23.909,1.583 22.746,1.583 22.746,2.746 23.909,2.746 hole: 23.753,2.591 22.901,2.591 22.901,1.738 23.753,1.738 23.753,2.513
  Top Layer region: 23.909,-4.309 22.746,-4.309 22.746,-3.146 23.909,-3.146 hole: 23.753,-3.301 22.901,-3.301 22.901,-4.153 23.753,-4.153
  Top Layer region: 22.746,-2.138 22.746,-1.673 23.909,-1.673 23.909,-2.836 22.746,-2.836 22.746,-2.216
  Top Layer region: 23.753,-0.2 23.909,-0.2 23.909,-1.363 22.746,-1.363 22.746,-0.2 23.676,-0.2
  Top Layer region: 22.746,3.831 22.746,4.219 23.909,4.219 23.909,3.056 22.746,3.056 22.746,3.753
  Top Layer region: 21.816,1.273 22.436,1.273 22.436,0.11 21.273,0.11 21.273,1.273 21.738,1.273
  Top Layer region: 21.273,-2.836 21.273,-1.673 22.436,-1.673 22.436,-2.836 21.35,-2.836
  Top Layer region: 22.436,-4.309 21.273,-4.309 21.273,-3.146 22.436,-3.146 hole: 22.281,-3.301 21.428,-3.301 21.428,-4.076 21.428,-4.153 22.281,-4.153
  Top Layer region: 22.436,3.211 22.436,3.056 21.273,3.056 21.273,4.219 22.436,4.219 22.436,3.288
  Top Layer region: 22.436,-1.363 21.273,-1.363 21.273,-0.2 22.436,-0.2 hole: 22.281,-0.355 21.428,-0.355 21.428,-0.665 21.428,-0.743 21.428,-1.208 22.281,-1.208
  Top Layer region: 22.436,1.893 22.436,1.816 22.436,1.583 21.273,1.583 21.273,2.746 22.436,2.746 hole: 22.281,2.591 21.428,2.591 21.428,1.738 22.281,1.738
  Top Layer region: 20.963,2.436 20.963,1.583 19.8,1.583 19.8,2.746 20.963,2.746 20.963,2.513
  Top Layer region: 20.963,-4.309 19.8,-4.309 19.8,-3.146 20.963,-3.146 hole: 20.808,-3.301 19.955,-3.301 19.955,-4.153 20.808,-4.153 20.808,-3.533 20.808,-3.456
  Top Layer region: 20.963,3.366 20.963,3.056 19.8,3.056 19.8,4.219 20.963,4.219 20.963,3.443
  Top Layer region: 20.575,-2.836 19.8,-2.836 19.8,-1.673 20.963,-1.673 20.963,-2.836 20.653,-2.836
  Top Layer region: 19.955,0.11 19.8,0.11 19.8,1.273 20.963,1.273 20.963,0.11 20.033,0.11
  Top Layer region: 20.963,-1.363 19.8,-1.363 19.8,-0.51 19.8,-0.433 19.8,-0.2 20.963,-0.2 hole: 20.808,-0.355 19.955,-0.355 19.955,-0.665 19.955,-0.743 19.955,-1.208 20.808,-1.208
  Top Layer region: 19.49,-2.836 18.327,-2.836 18.327,-2.138 18.327,-2.06 18.327,-1.673 19.49,-1.673 hole: 19.335,-1.828 18.482,-1.828 18.482,-2.138 18.482,-2.216 18.482,-2.681 19.335,-2.681
  Top Layer region: 19.102,-3.146 19.49,-3.146 19.49,-4.309 18.327,-4.309 18.327,-3.146 19.025,-3.146
  Top Layer region: 19.49,0.11 18.327,0.11 18.327,1.273 19.49,1.273 hole: 19.335,1.118 18.482,1.118 18.482,0.73 18.482,0.653 18.482,0.265 19.335,0.265
  Top Layer region: 18.327,2.513 18.327,2.746 19.49,2.746 19.49,1.583 18.327,1.583 18.327,2.436
  Top Layer region: 19.49,3.056 18.327,3.056 18.327,4.219 19.49,4.219 hole: 19.335,4.064 18.482,4.064 18.482,3.211 19.335,3.211
  Top Layer region: 19.335,-1.363 18.327,-1.363 18.327,-0.2 19.49,-0.2 19.49,-1.363 19.412,-1.363
  Top Layer region: 16.854,2.126 16.854,2.746 18.017,2.746 18.017,1.583 16.854,1.583 16.854,2.048
  Top Layer region: 18.017,-3.611 18.017,-4.309 16.854,-4.309 16.854,-3.146 18.017,-3.146 18.017,-3.533
  Top Layer region: 16.854,-0.433 16.854,-0.2 18.017,-0.2 18.017,-1.363 16.854,-1.363 16.854,-0.51
  Top Layer region: 18.017,-1.75 18.017,-2.836 16.854,-2.836 16.854,-1.673 18.017,-1.673 hole: 17.862,-1.828 17.009,-1.828 17.009,-2.448 17.009,-2.526 17.009,-2.681 17.862,-2.681
  Top Layer region: 18.017,3.056 16.854,3.056 16.854,4.219 18.017,4.219 hole: 17.862,4.064 17.009,4.064 17.009,3.211 17.862,3.211
  Top Layer region: 18.017,0.11 16.854,0.11 16.854,1.273 18.017,1.273 hole: 17.862,1.118 17.009,1.118 17.009,0.265 17.862,0.265
  Top Layer region: 15.381,0.808 15.381,1.273 16.544,1.273 16.544,0.11 15.381,0.11 15.381,0.73
  Top Layer region: 16.544,2.513 16.544,1.583 15.381,1.583 15.381,2.746 16.544,2.746 16.544,2.591
  Top Layer region: 16.002,-0.2 16.544,-0.2 16.544,-1.363 15.381,-1.363 15.381,-0.2 15.924,-0.2
  Top Layer region: 15.381,-4.153 15.381,-3.146 16.544,-3.146 16.544,-4.309 15.381,-4.309 15.381,-4.231
  Top Layer region: 16.544,3.056 15.381,3.056 15.381,4.219 16.544,4.219 hole: 16.389,4.064 15.536,4.064 15.536,3.676 15.536,3.598 15.536,3.211 16.389,3.211
  Top Layer region: 16.234,-2.836 15.381,-2.836 15.381,-1.673 16.544,-1.673 16.544,-2.836 16.312,-2.836
  Top Layer region: 13.986,1.583 13.909,1.583 13.909,2.746 15.071,2.746 15.071,1.583 14.064,1.583
  Top Layer region: 15.071,0.575 15.071,0.11 13.909,0.11 13.909,1.273 15.071,1.273 15.071,0.653
  Top Layer region: 14.684,4.219 15.071,4.219 15.071,3.056 13.909,3.056 13.909,4.219 14.606,4.219
  Top Layer region: 14.994,-2.836 13.909,-2.836 13.909,-1.673 15.071,-1.673 15.071,-2.836
  Top Layer region: 15.071,-1.208 15.071,-1.363 13.909,-1.363 13.909,-0.2 15.071,-0.2 15.071,-1.13
  Top Layer region: 15.071,-4.309 13.909,-4.309 13.909,-3.146 15.071,-3.146 hole: 14.916,-3.301 14.064,-3.301 14.064,-4.153 14.916,-4.153 14.916,-3.921 14.916,-3.843
  Top Layer region: -14.858,0.379 -14.822,0.343 -14.837,0.286 -14.887,0.235 -14.959,0.192 -14.966,0.142 -14.952,0.099 -14.966,-0.074 -15.024,-0.174 -15.045,-0.196 -15.117,-0.225 -15.175,-0.239 -15.362,-0.254 -15.836,-0.239 -15.879,-0.225 -16.002,-0.203 -16.073,-0.189 -16.145,-0.16 -16.224,-0.138 -16.332,-0.131 -16.339,-0.095 -16.304,-0.045 -16.253,0.005 -16.224,0.02 -16.167,0.077 -16.138,0.092 -16.109,0.12 -15.807,0.264 -15.75,0.279 -15.642,0.314 -15.635,0.322 -15.462,0.35 -15.405,0.365 -15.218,0.379 -15.16,0.394 hole: -15.448,0.25 -15.491,0.235 -15.52,0.221 -15.541,0.199 -15.556,0.142 -15.541,-0.059 -15.505,-0.138 -15.455,-0.146 -15.326,-0.131 -15.297,-0.103 -15.333,-0.009 -15.34,0.012 -15.34,0.027 -15.347,0.106 -15.34,0.243 hole: -15.735,0.178 -15.743,0.171 -15.75,0.163 -15.843,0.128 -16.095,-0.009 -16.102,-0.045 -16.081,-0.067 -16.023,-0.081 -15.944,-0.103 -15.872,-0.117 -15.757,-0.131 -15.678,-0.138 -15.642,-0.117 -15.656,0.07 -15.671,0.128 -15.685,0.171
  Top Layer region: -16.081,2.925 -16.102,2.989 -16.088,3.061 -16.052,3.097 -15.994,3.112 -15.937,3.097 -15.901,3.061 -15.879,2.982 -15.901,2.932 -15.922,2.91 -15.994,2.881 -16.066,2.91 -16.073,2.917
  Top Layer region: -16.354,2.709 -16.311,2.752 -16.239,2.738 -16.217,2.716 -16.203,2.687 -16.188,2.644 -16.203,2.601 -16.224,2.565 -16.282,2.551 -16.339,2.565 -16.39,2.615 -16.375,2.687 -16.361,2.702
  Top Layer region: -16.656,2.292 -16.62,2.342 -16.526,2.349 -16.49,2.313 -16.505,2.213 -16.541,2.177 -16.613,2.191 -16.649,2.227 -16.663,2.285
  Top Layer region: -18.223,-2.569 -18.094,-2.67 -18.072,-2.691 -18.029,-2.792 -18.044,-2.979 -18.101,-3.079 -18.123,-3.101 -18.151,-3.115 -18.18,-3.144 -18.252,-3.173 -18.374,-3.18 -18.446,-3.166 -18.525,-3.115 -18.619,-3.022 -18.64,-2.943 -18.648,-2.792 -18.576,-2.662 -18.525,-2.612 -18.504,-2.605 -18.497,-2.598 -18.396,-2.554 hole: -18.295,-2.67 -18.41,-2.684 -18.425,-2.684 -18.504,-2.749 -18.533,-2.821 -18.547,-2.878 -18.511,-2.972 -18.489,-2.993 -18.475,-3.022 -18.396,-3.058 -18.338,-3.072 -18.259,-3.051 -18.209,-3.015 -18.159,-2.964 -18.144,-2.907 -18.13,-2.864 -18.159,-2.777 -18.223,-2.698
  Top Layer region: 407 vertices and 73 holes, not listed, extent -23.868,-6.207 -13.456,6.218
  Top Layer region: -19.892,3.183 -19.927,3.219 -19.942,3.277 -19.927,3.363 -19.848,3.399 -19.776,3.385 -19.741,3.349 -19.755,3.219 -19.791,3.183 -19.877,3.183
HeaterWire_1 [mm]
  rect 3.45x1.85 smd far side: 1(0,0) 2(0,-3.5) 3(0,-7)
  rect 1x1 smd far side: ""(8,-5) ""(8,-6.5)
  Bottom Layer drawing of 992 lines, arcs and shapes, not listed
QFN65P400X400X100-17N-D [mm]
  rect 1.05x0.35 smd: 1(-1.85,0.975) 2(-1.85,0.325) 3(-1.85,-0.325) 4(-1.85,-0.975) 9(1.85,-0.975) 10(1.85,-0.325) 11(1.85,0.325) 12(1.85,0.975)
  rect 0.35x1.05 smd: 5(-0.975,-1.85) 6(-0.325,-1.85) 7(0.325,-1.85) 8(0.975,-1.85) 13(0.975,1.85) 14(0.325,1.85) 15(-0.325,1.85) 16(-0.975,1.85)
  rect 2.26x2.26 smd: 17(0,0)
  silkscreen extent -2.54,-2 2,2.11, body extent -1.99,-2.06 2.01,1.94, height 1
RES_SM0603_YAGEORC_N [mm] "Resistor, Yageo RC_L, SM0603, IPC Medium Density"
  rect 0.7x0.9 smd: 1(-0.827,0) 2(0.827,0)
  body extent -0.85,-0.45 0.85,0.45, height 0.55
"S1751-46 TestPoint" [mm]
  rect 3.45x1.85 smd: 1(0,0)
"SHT45 DFN" [mm] "DFN, 4-Leads, Body 1.50x1.50mm, Pitch 0.80mm, IPC Medium Density"
  rect 0.6x0.35 smd: 1(-0.7,0.4) 2(-0.7,-0.4) 3(0.7,-0.4) 4(0.7,0.4)
  silkscreen extent -1.25,-0.85 0.85,0.85, body extent -0.8,-0.8 0.8,0.8, height 0.8
SOT65P210X110-5N_SC70 [mm] "SC70/SOT23, 5-Leads, Body 2.00x2.10mm, Pitch 0.65mm, IPC Medium Density"
  rect 0.85x0.4 smd: 1(-1.125,0.65) 2(-1.125,0) 3(-1.125,-0.65) 4(1.125,-0.65) 5(1.125,0.65)
  silkscreen extent -1.25,-1.1 0.3,1.52, body extent -0.7,-1.07 0.7,1.08, height 1.1
TPS784xxxQDRBRQ1_SON [mm] "SON127P600-8N"
  rect 0.9x0.35 smd: 1(-1.395,0.975) 2(-1.395,0.325) 3(-1.395,-0.325) 4(-1.395,-0.975) 5(1.395,-0.975) 6(1.395,-0.325) 7(1.395,0.325) 8(1.395,0.975)
  rect 1.49x2.4 smd: 9(0,0)
  silkscreen extent -2.15,-1.7 1.7,1.75, body extent -1.55,-1.55 1.55,1.55, height 1
TSM-120-01-T-SH [mm]
  rect 1.27x3.18 smd: 1(0,0) 2(2.54,0) 3(5.08,0) 4(7.62,0) 5(10.16,0) 6(12.7,0) 7(15.24,0) 8(17.78,0) 9(20.32,0) 10(22.86,0)
  silkscreen extent -1.27,-1.27 24.13,6.57